# Altium PCB [PCB]_Main.PcbDoc (part 2 of 2)
Units mm, origin at the board's own origin, x right, y up, seen from the top; angles counter-clockwise.
Board outline 74 x 97 mm, 2 copper layers (Top Layer, Bottom Layer); 95 components, 55 nets, 265 pads, 42 vias.
Unrouted connection lines stored in the file: 7.
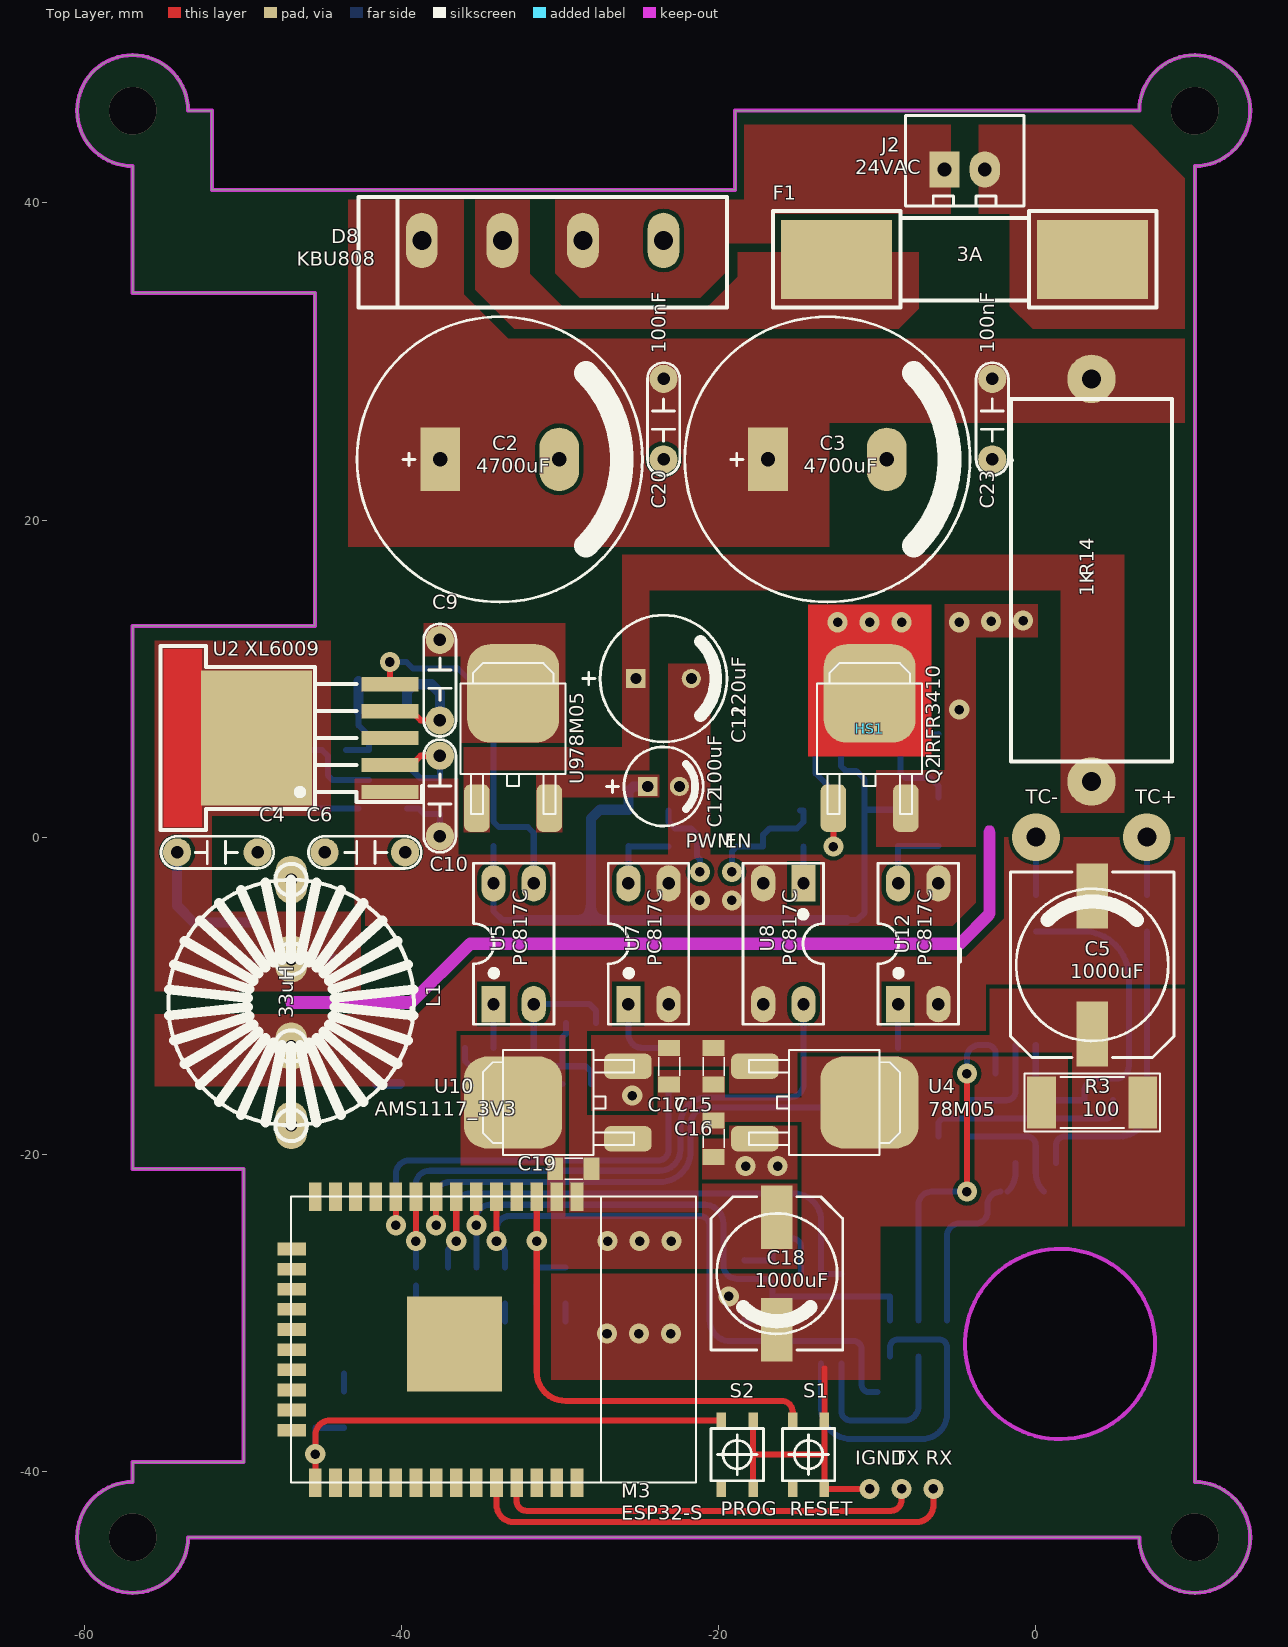
[diagram p0: Top Layer view]

## Polygon pours and split planes (outlines as drawn) (continued)
GND on Bottom Layer "GND_L02_P076" (solid, pour order 76): -32.403,1.119 -30.955,1.119 -30.955,4.229 -32.403,4.229
GND on Bottom Layer "GND_L02_P070" (solid, pour order 70): -32.403,5.677 -32.403,4.229 -23.281,4.229 -23.281,5.677
TC+ on Bottom Layer "TC+_L02_P040" (solid, pour order 40): -42.585,0.521 -42.585,-4.331 -51.602,-4.331 -51.602,12.382 -43.372,12.383 -43.372,31.966 -34.736,31.966 -34.736,18.428 -41.112,18.428 -41.112,9.167 -49.062,9.167 -49.062,0.521
GND on Bottom Layer "GND_L02_P068" (solid, pour order 68): -38.614,13.478 -38.614,11.396 -23.281,11.396 -23.281,13.479
NetC6_1 on Bottom Layer "NETC6_1_L02_P066" (solid, pour order 66): -42.297,0.521 -42.297,-8.975 -39.579,-8.975 -39.579,-4.331 -38.766,-4.331 -38.766,0.521
GND on Bottom Layer "GND_L02_P054" (solid, pour order 54): -22.211,2.527 -22.211,1.119 -16.293,1.119 -16.293,2.527
GND on Bottom Layer "GND_L02_P036" (solid, pour order 36): -23.281,19.037 -23.281,2.527 -20.461,2.527 -20.461,19.037
no net on Bottom Layer "NONET_L02_P034" (solid, pour order 34): -22.697,18.936
no net on Bottom Layer "NONET_L02_P032" (solid, pour order 32): -23.027,19.469
GND on Bottom Layer "GND_L02_P018" (solid, pour order 18): -25.922,40.195 -25.922,31.966 -33.619,31.966 -33.619,18.428 0.113,18.428 0.113,31.966 -11.622,31.966 -11.622,40.195
no net on Bottom Layer "Bottom Layer-No Net" (solid, pour order 8): 21.703,55.181
no net on Top Solder (solid): -4.117,11.066 -5.441,12.39 -5.441,3.299 -4.117,1.975

## Keep-outs
Keep-Out Layer:
  circle w0.254: c1.517,-31.976 r6
  lines w0.254: -56.983,-40.676 ccw(c-56.983,-44.176) -53.483,-44.176 6.517,-44.176 ccw(c10.017,-44.176) 10.017,-40.676 10.017,42.324 ccw(c10.017,45.824) 6.517,45.824 -18.983,45.824 -18.983,40.824 -51.983,40.824 -51.983,45.824 -53.483,45.824 ccw(c-56.983,45.824) -56.983,42.324 -56.983,34.324 -45.483,34.324 -45.483,13.324 -56.983,13.324 -56.983,-20.926 -49.983,-20.926 -49.983,-39.426 -56.983,-39.426 -56.983,-40.676
  lines w0.7: -46.986,-10.437 -39.387,-10.437 -35.679,-6.729 -4.804,-6.729 -2.934,-4.859 -2.934,0.348

## Other copper
Top Layer:
  rectangle net TC-: -14.39,5.075 -6.601,14.684

## Silkscreen, mask and mechanical layers (free items; w line width, h text height)
Top Overlay:
  lines w0.254: -39.387,-11.552 -39.387,-10.787 ; -4.804,-7.844 -4.804,-7.079 ; -1.554,23.824 -1.499,23.769
  text "TC-" at -0.652,1.8 h1.52
  text "TC+" at 6.25,1.8 h1.52
  text "PWM" at -22.098,-0.994 h1.52
  text "EN" at -19.639,-0.995 h1.52
  text "IGND" at -11.395,-39.918 h1.52
  text "TX" at -8.95,-39.918 h1.52
  text "RX" at -6.959,-39.918 h1.52
Bottom Overlay:
  lines w0.254: -49.698,2.293 -49.698,6.289 -48.044,7.943 -43.983,7.943 ; -20.314,1.69 -19.833,1.69 -19.235,2.288 -19.235,6.225 ; -7.916,-26.684 -7.435,-26.684 -6.836,-26.086 -6.836,-22.149 ; 4.86,-11.723 5.341,-11.723 5.939,-11.125 5.939,-6.796
Top Solder:
  lines w0.254: -21.195,-3.995 -19.181,-3.995